# Altium PCB ESP32DEVKITC_2024-03-25.pcbdoc
Units mm, origin at the board's own origin, x right, y up, seen from the top; angles counter-clockwise.
Board outline 82.33 x 53.91 mm, 2 copper layers (Top Layer, Bottom Layer); 1 components, 0 nets, 38 pads, 0 vias.
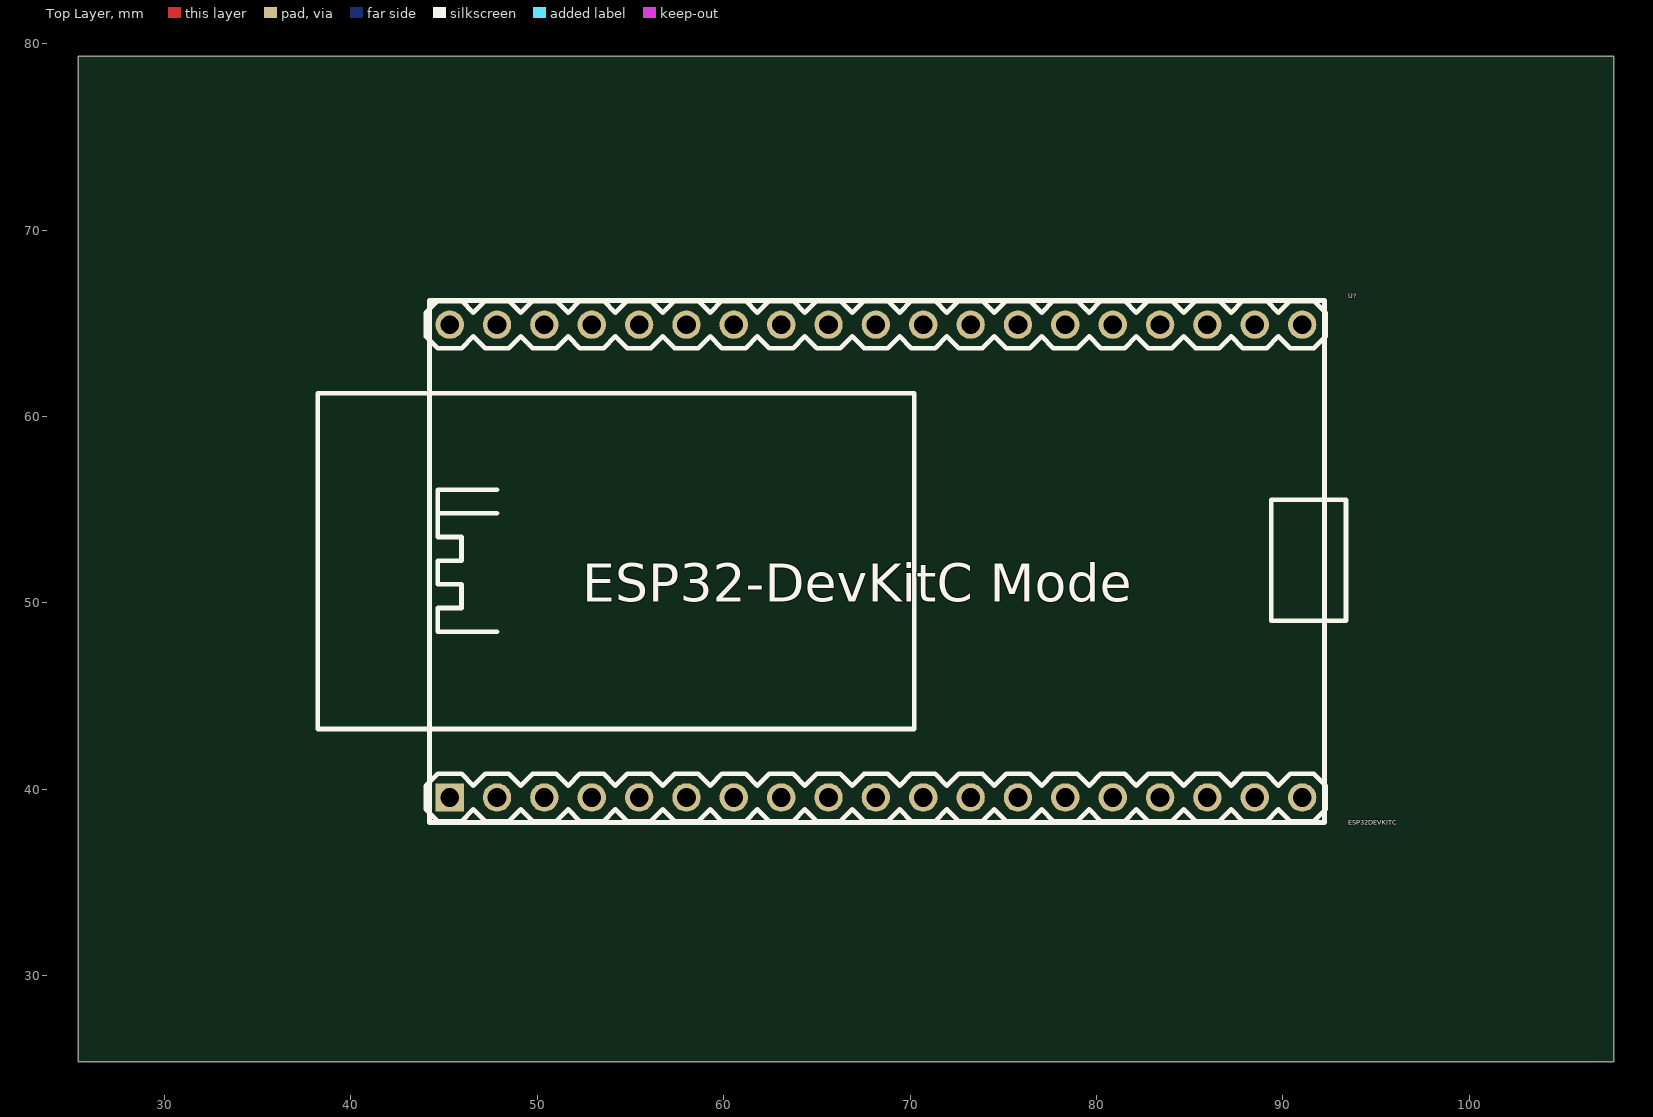
[diagram p0: Top Layer view]
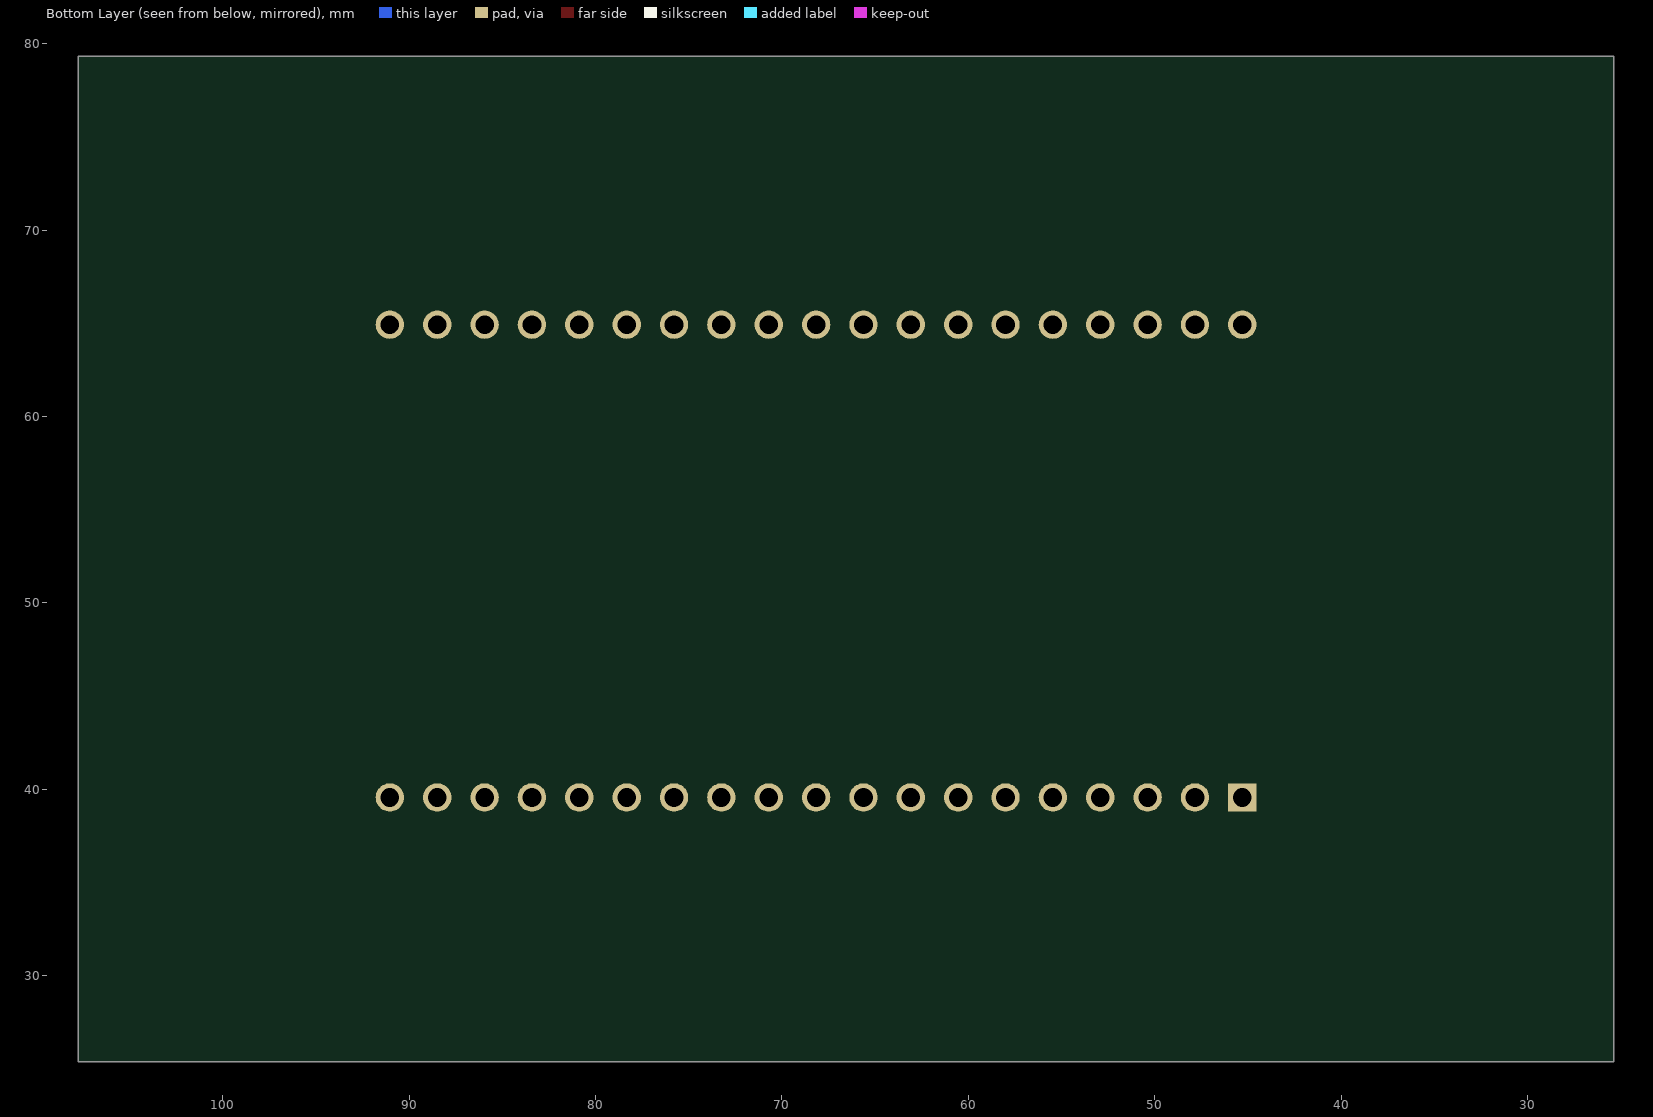
[diagram p1: Bottom Layer view, seen from below]

## Layer stack, top to bottom
Top Layer: signal copper (thickness not stored)
Dielectric: dielectric 0.32, FR-4, Dk 4.8
Bottom Layer: signal copper (thickness not stored)

## Board outline
107.727,25.4 25.4,25.4 25.4,79.308 107.727,79.308

## Components (designator, comment, footprint, x,y, rotation, side; value= is the part's Value field where it differs from the comment)
U? "ESP32DEVKITC" ESP32DEVKITC 65.802,52.227 r0 top

## Footprints (in the part's own frame and the unit in brackets; to place one, negate y for a bottom-side part, rotate by r counter-clockwise, add the part's x,y. Pads: shape width x height; smd on the part's side, far side on the other; paste and mask are expansions set on the pad)
ESP32DEVKITC [mil]
  rect 60x60 hole 39.37 paste+0 mask+4: 1(-806.88,-498.42)
  round 60 hole 39.37 paste+0 mask+4: 2(-706.88,-498.42) 3(-606.88,-498.42) 4(-506.88,-498.42) 5(-406.88,-498.42) 6(-306.88,-498.42) 7(-206.88,-498.42) 8(-106.88,-498.42) 9(-6.88,-498.42) 10(93.12,-498.42) 11(193.12,-498.42) 12(293.12,-498.42) 13(393.12,-498.42) 14(493.12,-498.42) 15(593.12,-498.42) 16(693.12,-498.42) 17(793.12,-498.42) 18(893.12,-498.42) 19(993.12,-498.42) 20(993.12,500) 21(893.12,500) 22(793.12,500) 23(693.12,500) 24(593.12,500) 25(493.12,500) 26(393.12,500) 27(293.12,500) 28(193.12,500) 29(93.12,500) 30(-6.88,500) 31(-106.88,500) 32(-206.88,500) 33(-306.88,500) 34(-406.88,500) 35(-506.88,500) 36(-606.88,500) 37(-706.88,500) 38(-806.88,500)
  silkscreen extent -1086,-551 1086,551

## Nets (pads, with @x,y where several pads share a name; then routed paths per layer and width w, separated by ;. In a path a pad name is that pad's centre, name@x,y a point inside that pad or via, vN(x,y) a via of type N, cw(c..) or ccw(c..) an arc to the next point about the centre after c; other vN are vias at no path point)
pads on no net: U?.1 U?.2 U?.3 U?.4 U?.5 U?.6 U?.7 U?.8 U?.9 U?.10 U?.11 U?.12 U?.13 U?.14 U?.15 U?.16 U?.17 U?.18 U?.19 U?.20 U?.21 U?.22 U?.23 U?.24 U?.25 U?.26 U?.27 U?.28 U?.29 U?.30 U?.31 U?.32 U?.33 U?.34 U?.35 U?.36 U?.37 U?.38

## Silkscreen, mask and mechanical layers (free items; w line width, h text height)
Document:
  lines w0.003: 66.563,52.354 66.564,52.354

## Text inside footprints (layer, text, board x,y; h text height)
U?: Top Overlay "ESP32-DevKitC Mode" at 52.419,50.068 h2.03